# Altium PCB LCD.PcbDoc
Units mm, origin at the board's own origin, x right, y up, seen from the top; angles counter-clockwise.
Board outline 99.27 x 61.29 mm, 2 copper layers (Top Layer, Bottom Layer); 6 components, 10 nets, 71 pads, 6 vias.
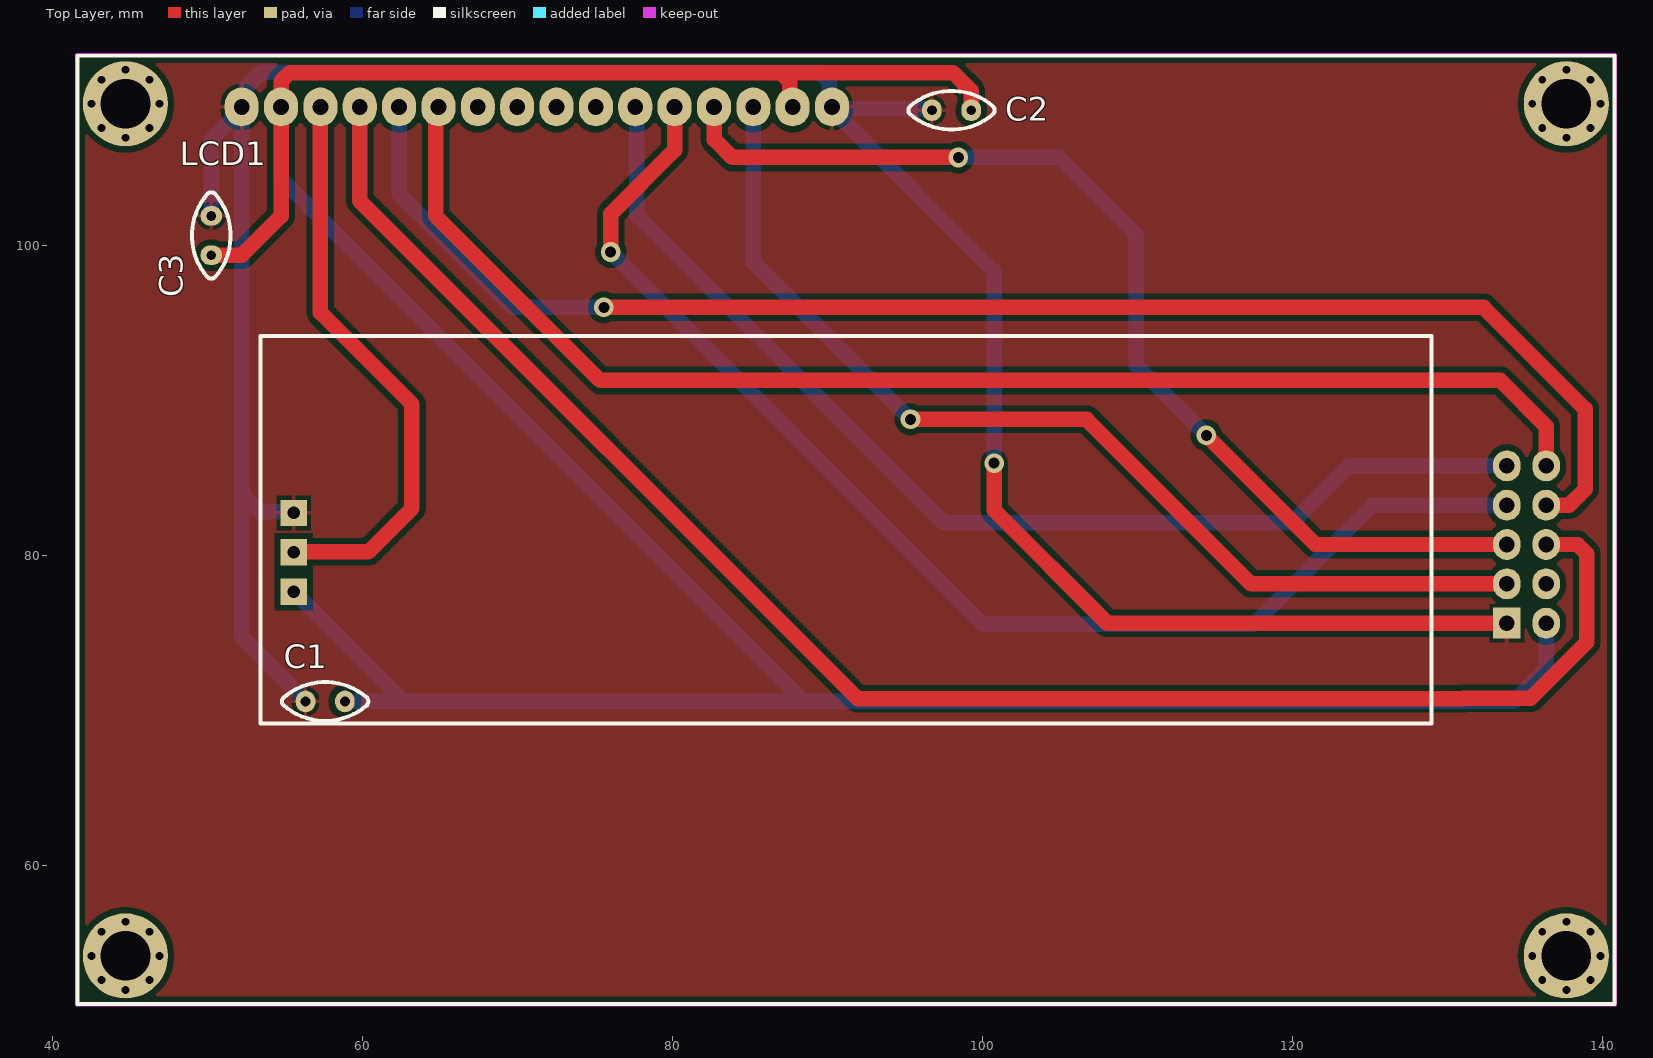
[diagram p0: Top Layer view]
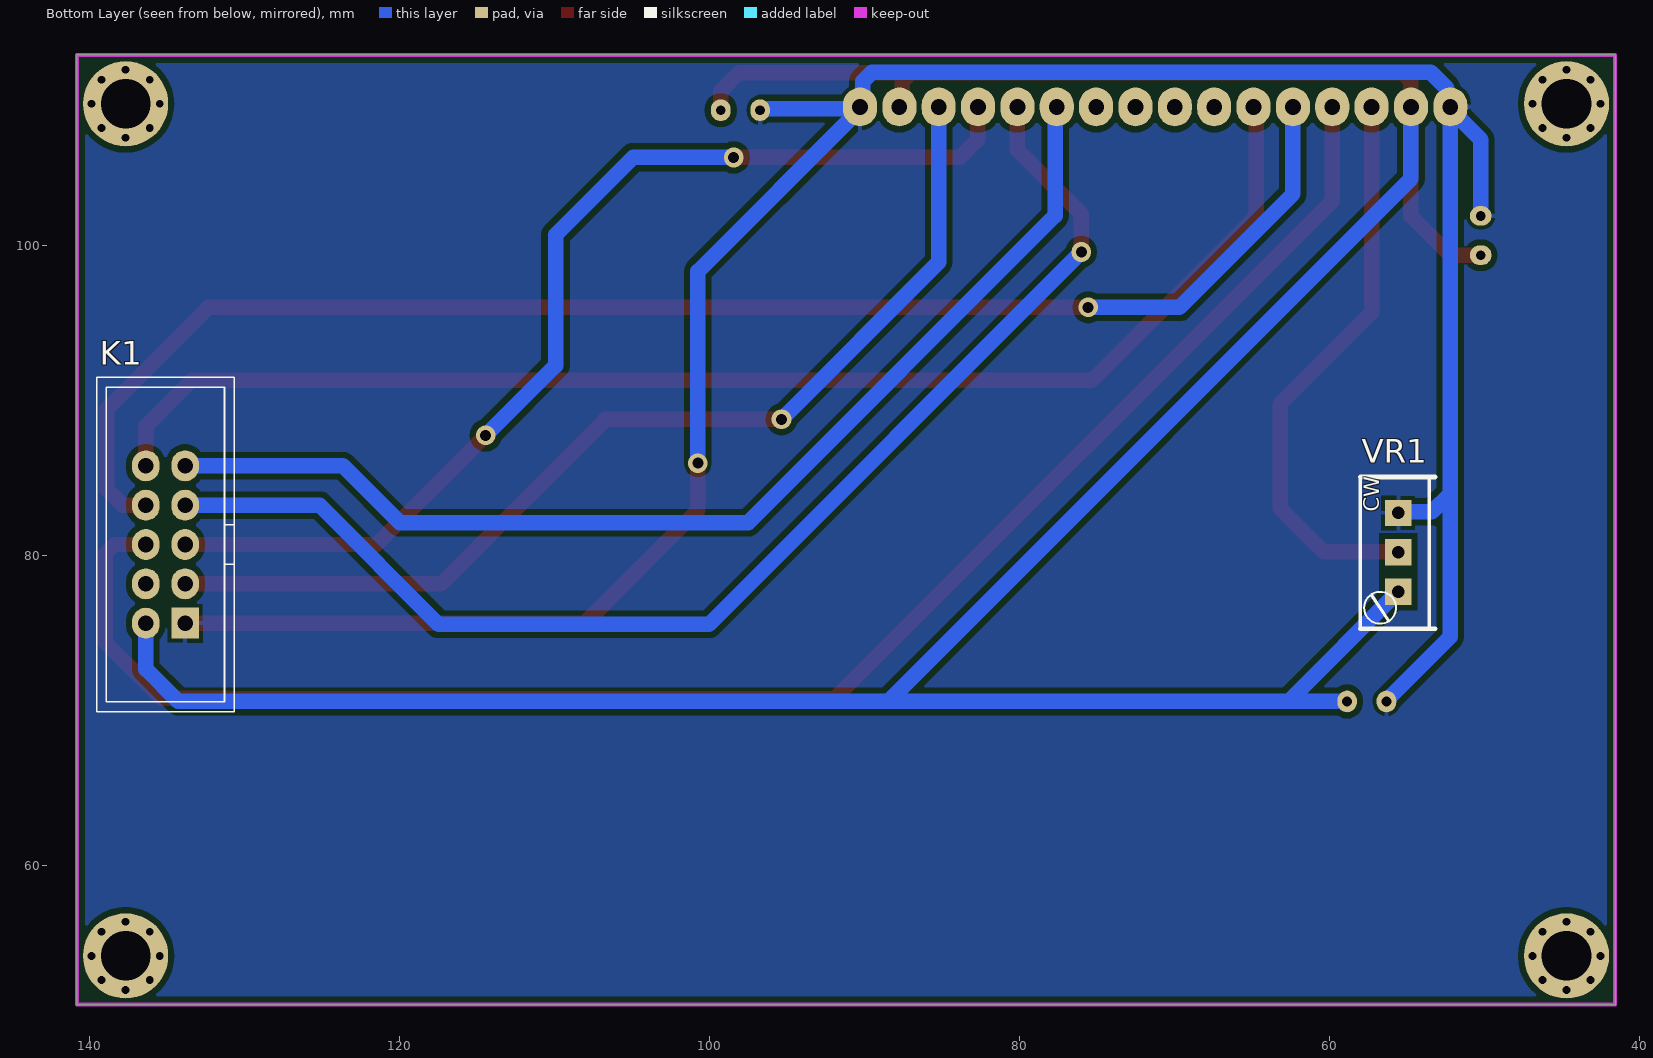
[diagram p1: Bottom Layer view, seen from below]

## Layer stack, top to bottom
Top Solder: solder mask 0.0102, Solder Resist, Dk 3.5
Top Layer: signal copper 0.0356
Dielectric 1: dielectric 0.32, FR-4, Dk 4.8
Bottom Layer: signal copper 0.0356
Bottom Solder: solder mask 0.0102, Solder Resist, Dk 3.5

## Board outline
41.563,51.024 41.563,112.319 140.838,112.319 140.838,51.024

## Design rules (kind name [scope] priority, off if disabled: settings)
Clearance [All] p1: gap=0.2 ignorepadtopadclearanceinfootprint=FALSE
Height [All] p1: minheight=0 maxheight=50 prefheight=12.7
PolygonConnect [All] p1: connectstyle=Relief reliefconductorwidth=0.254 reliefentries=4 polygonreliefangle="90 Angle" airgapwidth=0.254
RoutingVias [All] p1: holewidth=0.711 width=1.27 viastyle="Through Hole" minholewidth=0.711 minwidth=1.27 maxholewidth=0.711 maxwidth=1.27
SolderMaskExpansion [All] p1: expansion=0.102 istentingtop=FALSE
Width [All] p1: maxlimit=5 minlimit=0.254 preferedwidth=0.254
29 further rules are at their usual default settings.

## Components (designator, comment, footprint, x,y, rotation, side; value= is the part's Value field where it differs from the comment)
C1 "Capacitor." Cap_100nF 57.587,70.592 r180 top value=100nF
C2 "Capacitor." Cap_100nF 98.014,108.75 r180 top value=100nF
C3 "Capacitor." Cap_100nF 50.234,100.664 r90 top value=100nF
K1 "IDC10" IDC10-B 133.852,75.641 r90 bottom
LCD1 "20x4" "LCD 20x4" 91.197,81.666 r0 top
VR1 "Multi Turn" "Multi Turn" 55.559,80.219 r90 bottom value=1K

## Footprints (in the part's own frame and the unit in brackets; to place one, negate y for a bottom-side part, rotate by r counter-clockwise, add the part's x,y. Pads: shape width x height; smd on the part's side, far side on the other; paste and mask are expansions set on the pad)
Cap_100nF [mil]
  oval 50x55 hole 25: 1(-50,0) 2(50,0)
  silkscreen extent -110,-49 110,49, body extent -115,-34 115,33, height 272
IDC10-B [mil]
  rect 78.74x70 hole 40: 1(0,0)
  oval 78.74x70 hole 40: 2(0,100) 3(100,0) 4(100,100) 5(200,0) 6(200,100) 7(300,0) 8(300,100) 9(400,0) 10(400,100)
  silkscreen extent -225,-125 625,225, body extent -225,-125 625,225, height 358
"LCD 20x4" [mm]
  oval 2.2x2.5 hole 1.016: 1(-39,27.3) 2(-36.46,27.3) 3(-33.92,27.3) 4(-31.38,27.3) 5(-28.84,27.3) 6(-26.3,27.3) 7(-23.76,27.3) 8(-21.22,27.3) 9(-18.68,27.3) 10(-16.14,27.3) 11(-13.6,27.3) 12(-11.06,27.3) 13(-8.52,27.3) 14(-5.98,27.3) 15(-3.44,27.3) 16(-0.9,27.3)
  round 1 hole 0.5: MH(-48.7,-27.5) MH(-48.7,27.5) MH(-48.056,-29.056) MH(-48.056,-25.944) MH(-48.056,25.944) MH(-48.056,29.056) MH(-46.5,-29.7) MH(-46.5,-25.3) MH(-46.5,25.3) MH(-46.5,29.7) MH(-44.944,-29.056) MH(-44.944,-25.944) MH(-44.944,25.944) MH(-44.944,29.056) MH(-44.3,-27.5) MH(-44.3,27.5) MH(44.3,-27.5) MH(44.3,27.5) MH(44.944,-29.056) MH(44.944,-25.944) MH(44.944,25.944) MH(44.944,29.056) MH(46.5,-29.7) MH(46.5,-25.3) MH(46.5,25.3) MH(46.5,29.7) MH(48.056,-29.056) MH(48.056,-25.944) MH(48.056,25.944) MH(48.056,29.056) MH(48.7,-27.5) MH(48.7,27.5)
  round 5.5 hole 3.2: MH(-46.5,-27.5) MH(-46.5,27.5) MH(46.5,-27.5) MH(46.5,27.5)
  silkscreen extent -49.6,-30.6 49.6,30.6, body extent -49,-30 49,30, height 26.17
"Multi Turn" [mm]
  rect 1.7x1.7 hole 0.8: 1(-2.54,0) 2(2.54,0) 3(0,0)
  silkscreen extent -4.94,-2.4 4.86,2.45, body extent -4.6,-2.41 4.6,2.39, height 11.96

## Part data
C1 C2 C3: "Capacitor", LatestRevisionDate=17-Jul-2002, LatestRevisionNote="Re-released for DXP Platform.", Publisher="Altium Limited"
K1: "BOXHEADER 10 PIN", Color=Gray, Manufacturer="Assmann Electronics Inc", Manufacturer Part Number=AWHW10G-0202-T-R, Supplier Part Number=HRP10H-ND, Category="Connectors, Interconnects", Connector type="Header, Shrouded", Contact Finish=Gold, Contact Finish Thickness=Flash, Contact Mating Length=-, Contact Type="Male Pin", Fastening Type=-, Features=-, Mounting Type="Through Hole", Number of Positions=10, Number of Positions Loaded=All, Number of Rows=2, Packaging=Tray, Pitch="0.100\" (2.54mm)", RoHS="RoHS Compliant", Row Spacing="0.100\" (2.54mm)", Supplier=Digi-Key, Supplier 1=Digi-Key, Supplier Part Number 1=HRP10H-ND, Termination=Solder
LCD1: library part LCD, Adding Date=10/21/2009, Company="My self", Designer="Saeid Jorablo", LCDType=20x4
VR1: Email=Razi.vesali@gmail.com, LatestRevisionDate=17-Jul-2016, LatestRevisionNote="Re-released for Puplic", Publisher="Seyed Razi vesali (SRV)"

## Via types
v1: diameter 1.27, hole 0.711, Top Layer to Bottom Layer, 6 vias

## Nets (pads, with @x,y where several pads share a name; then routed paths per layer and width w, separated by ;. In a path a pad name is that pad's centre, name@x,y a point inside that pad or via, vN(x,y) a via of type N, cw(c..) or ccw(c..) an arc to the next point about the centre after c; other vN are vias at no path point)
+5: C1.1 C2.1 C3.1 K1.2 LCD1.2 LCD1.15 VR1.1 | length 207
  Top Layer w1: C3.1 52.212,99.394 54.737,101.918 LCD1.2 54.737,110.623 55.294,111.179 86.972,111.179 ; LCD1.15 87.558,109.165 87.558,110.594 86.972,111.179 ; C2.1 99.284,109.998 98.103,111.179 86.972,111.179
  Bottom Layer w1: LCD1.2 54.737,104.329 88.474,70.592 ; VR1.1 62.647,70.592 ; C1.1 62.647,70.592 ; K1.2 136.392,72.684 134.3,70.592 88.474,70.592 ; 62.647,70.592 88.474,70.592
DB4: K1.9 LCD1.11 | length 72.9
  Bottom Layer w1: LCD1.11 77.706,108.857 77.706,101.943 97.524,82.125 119.993,82.125 123.669,85.801 K1.9
DB5: K1.7 LCD1.12 | length 82
  Top Layer w1: v1(76.015,99.601) 76.015,102.061 80.137,106.182 LCD1.12
  Bottom Layer w1: v1(76.015,99.601) 100.047,75.569 117.49,75.569 125.182,83.261 K1.7
DB6: K1.5 LCD1.13 | length 69.1
  Top Layer w1: LCD1.13 82.705,108.938 82.705,106.855 83.857,105.703 v1(98.456,105.703) ; v1(114.456,87.763) 121.498,80.721 K1.5
  Bottom Layer w1: v1(98.456,105.703) 98.48,105.727 104.925,105.727 109.947,100.705 109.947,92.272 v1(114.456,87.763)
DB7: K1.3 LCD1.14 | length 67.3
  Top Layer w1: v1(95.361,88.799) 106.731,88.799 117.349,78.181 K1.3
  Bottom Layer w1: LCD1.14 85.217,98.943 v1(95.361,88.799)
EN: K1.10 LCD1.6 | length 87
  Top Layer w1: LCD1.6 64.712,108.781 64.712,101.928 75.329,91.31 133.435,91.31 136.392,88.353 K1.10
GND: C1.2 C2.2 C3.2 K1.1 LCD1.1 LCD1.16 VR1.2 | length 166.1
  Top Layer w1: v1(100.764,85.968) 100.764,82.941 108.063,75.641 K1.1
  Bottom Layer w1: C3.2 50.234,106.853 LCD1.1@52.197,108.816 ; VR1.2 55.493,82.826 53.393,82.826 52.197,84.022 ; C1.2 56.317,70.655 52.197,74.775 52.197,84.022 ; C2.2 96.637,108.858 90.405,108.858 LCD1.16 ; v1(100.764,85.968) 100.764,98.349 90.297,108.816 LCD1.16 ; 52.197,84.022 LCD1.1@52.197,108.816 ; LCD1.1@52.197,108.816 LCD1.1 52.427,109.196 52.427,110.171 53.457,111.202 89.534,111.202 90.12,110.616 90.12,109.143 LCD1.16
RS: K1.6 LCD1.4 | length 108.6
  Top Layer w1: LCD1.4 59.817,102.904 91.947,70.774 131.037,70.774 131.071,70.808 135.41,70.808 139,74.399 139,80.135 138.415,80.721 K1.6
RW: K1.8 LCD1.5 | length 96.4
  Top Layer w1: v1(75.567,96.029) 132.348,96.029 138.899,89.478 138.899,84.281 137.879,83.261 K1.8 K1.8@136.652,83.521
  Bottom Layer w1: LCD1.5 62.357,103.349 69.677,96.029 v1(75.567,96.029)
V0: LCD1.3 VR1.3 | length 37.2
  Top Layer w1: VR1.3 55.587,80.247 60.375,80.247 63.186,83.057 63.186,89.779 57.277,95.688 LCD1.3
pads on no net: K1.4 LCD1.7 LCD1.8 LCD1.9 LCD1.10 LCD1.MH

## Polygon pours and split planes (outlines as drawn)
GND on Bottom Layer "BOTT-GND" (solid, remove dead copper, pour order 0): 41.597,51.066 140.797,51.066 140.797,112.266 41.597,112.266
GND on Top Layer "TOP-GND" (solid, remove dead copper, pour order 1): 140.797,112.266 140.797,51.066 41.597,51.066 41.597,112.266

## Keep-outs
Keep-Out Layer:
  the board outline again, w0.254

## Text inside footprints (layer, text, board x,y; h text height)
VR1: Bottom Overlay "CW" at 56.778,82.835 h1 r270